# Altium PCB mt-kugreen-01.PcbDoc (part 1 of 2)
Units mm, origin at the board's own origin, x right, y up, seen from the top; angles counter-clockwise.
Board outline 84.8 x 48.4 mm, 2 copper layers (Top Layer, Bottom Layer); 75 components, 51 nets, 296 pads, 97 vias.
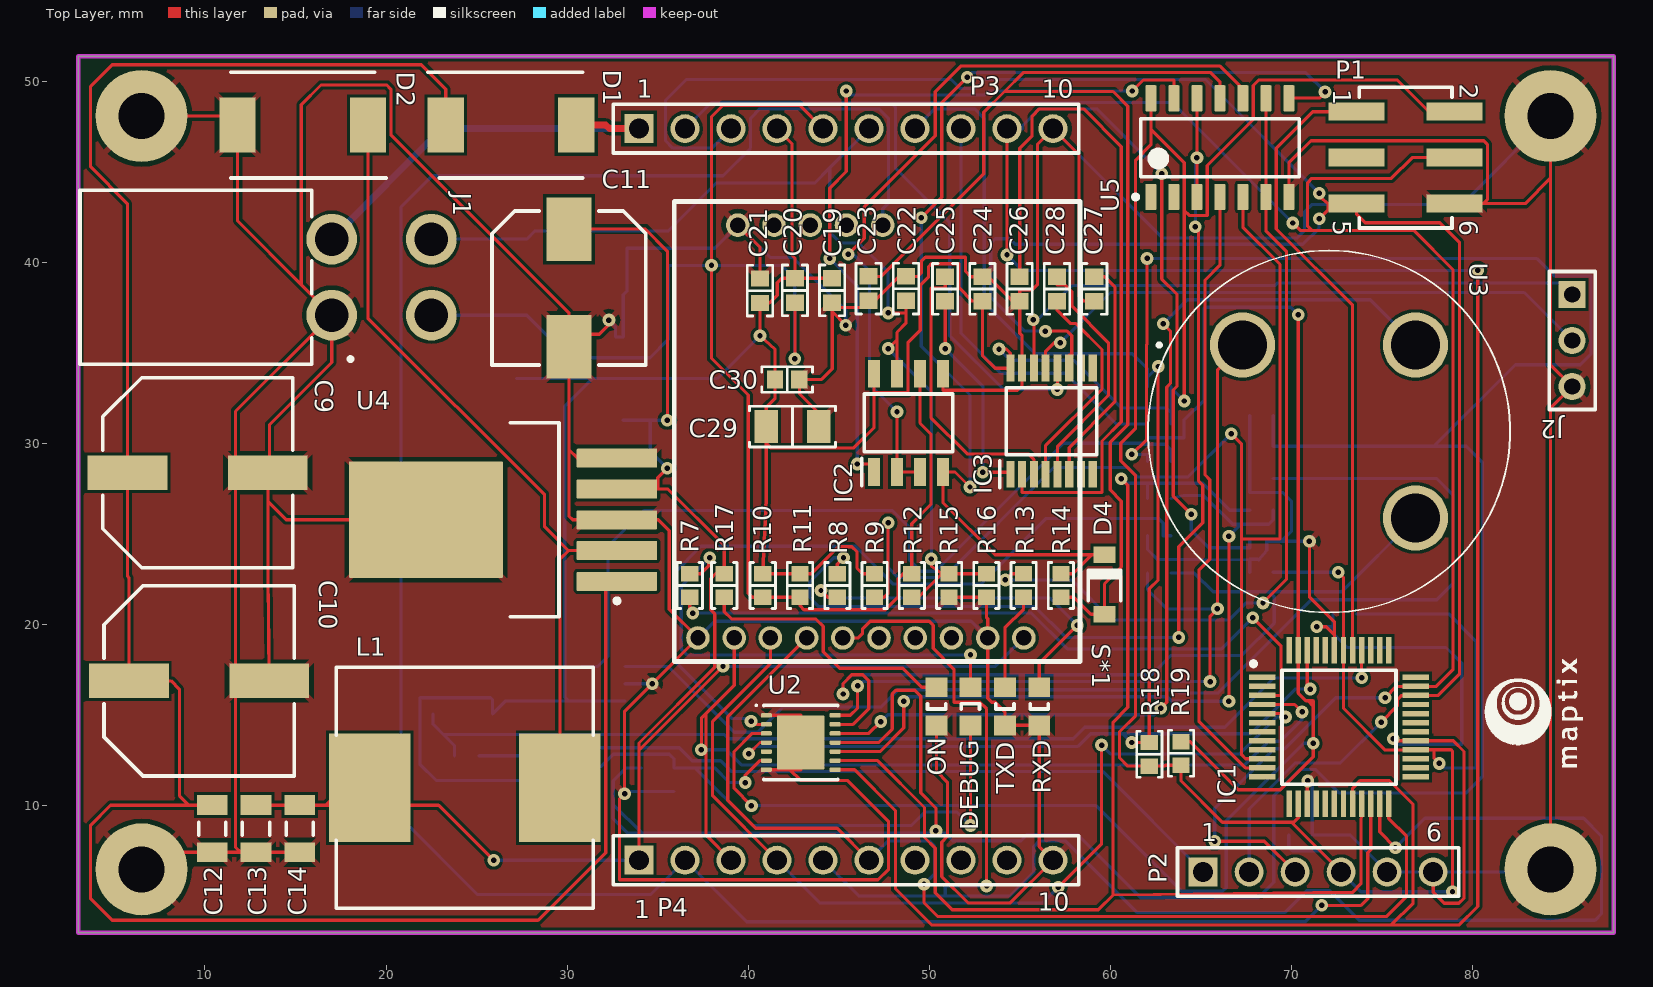
[diagram p0: Top Layer view]
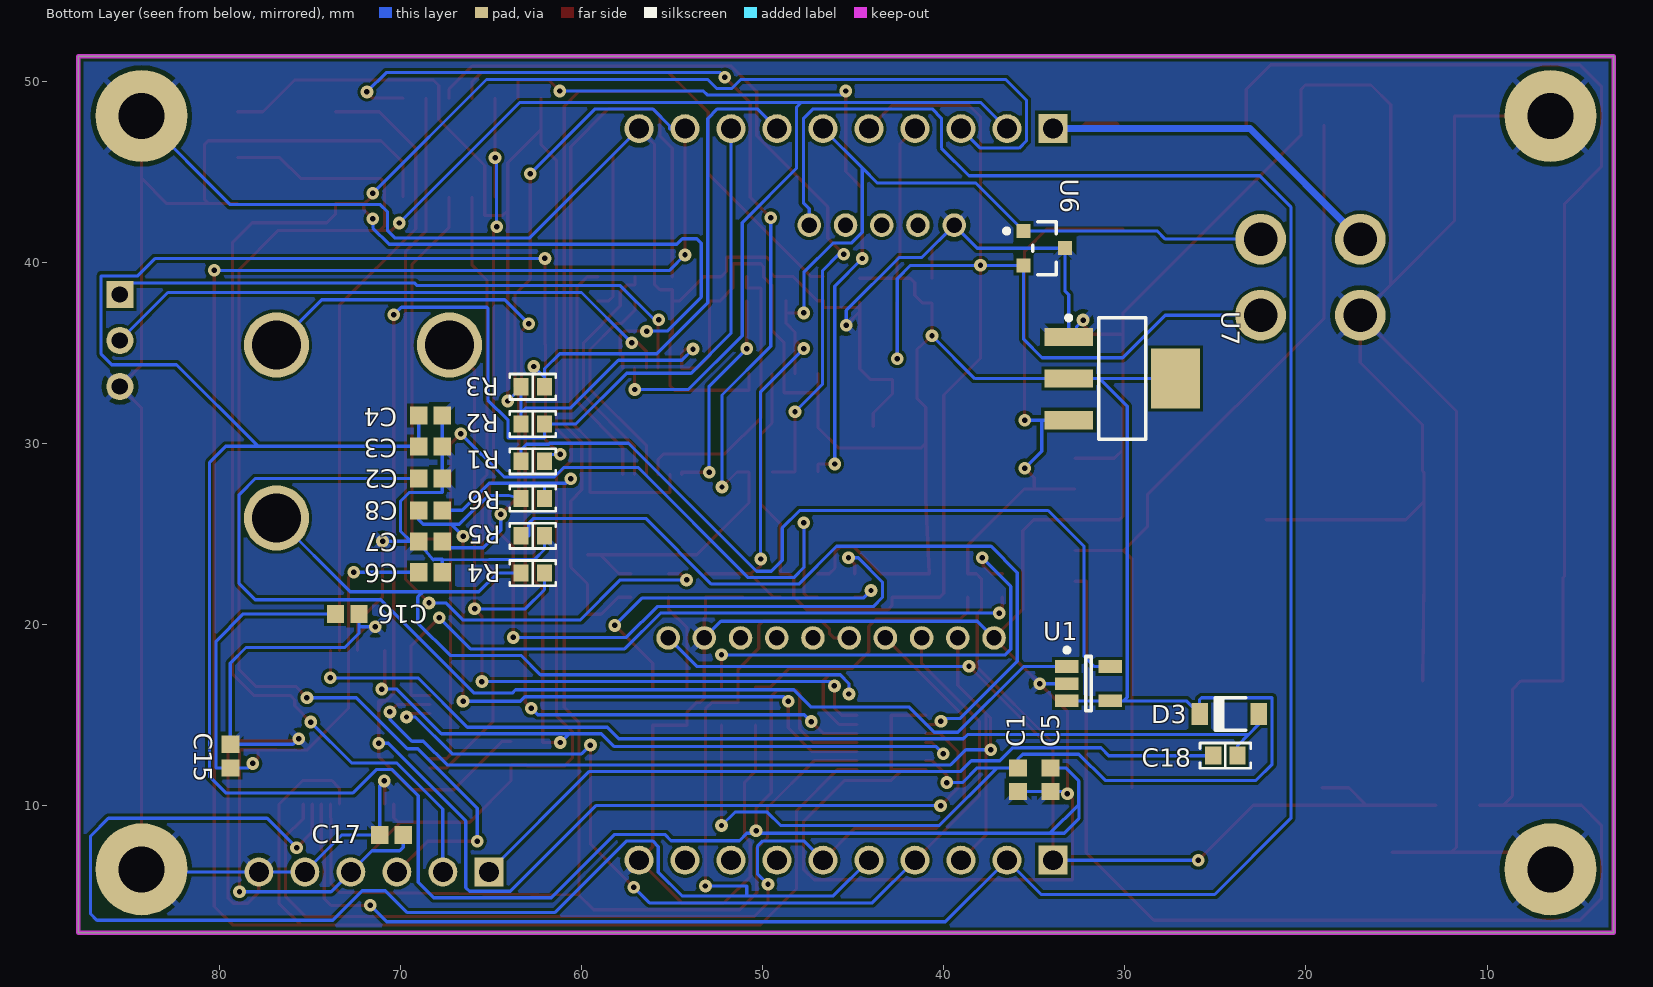
[diagram p1: Bottom Layer view, seen from below]
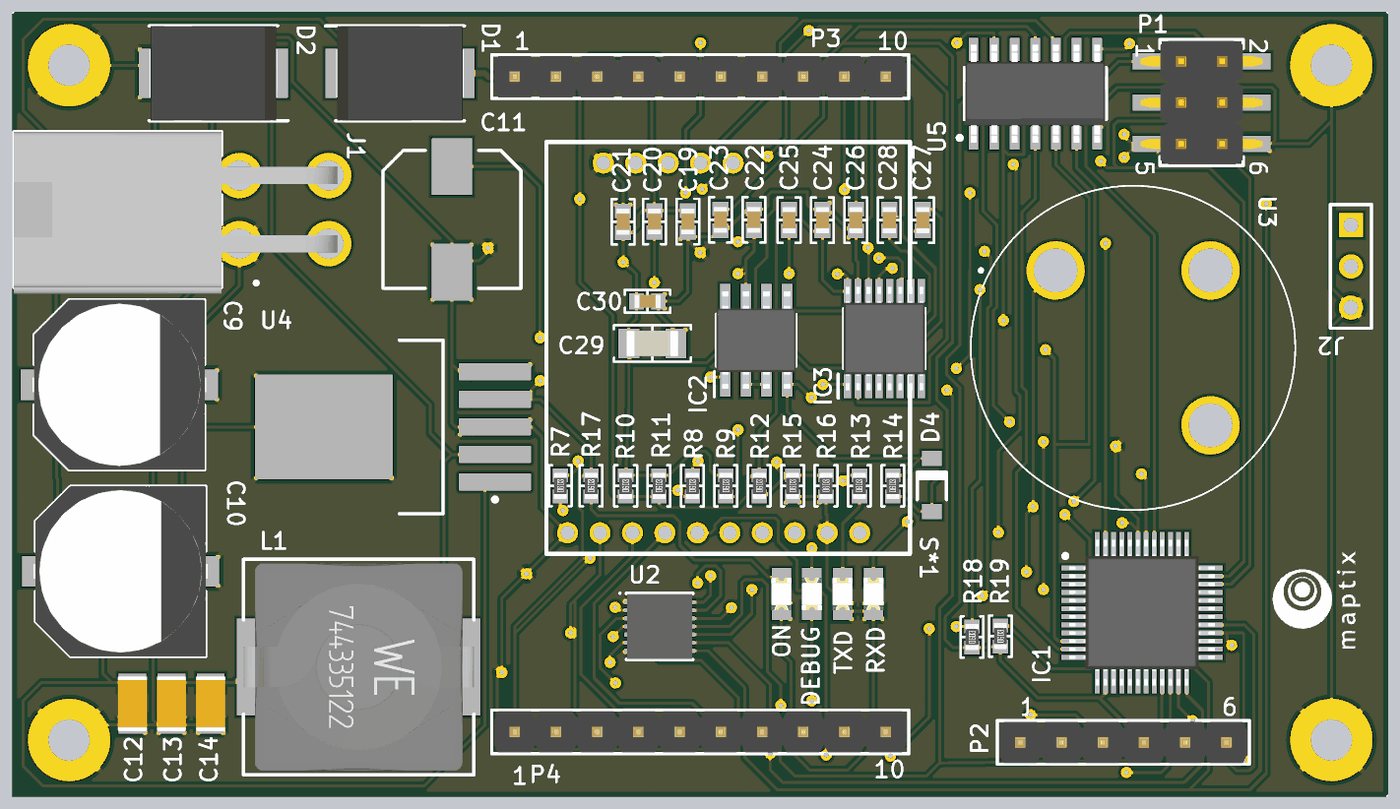
[diagram p2: 3D render of the assembled board from above, using the file's embedded part models]

## Layer stack, top to bottom
Top Solder: solder mask 0.0102, Solder Resist, Dk 3.5
Top Layer: signal copper 0.0356
Dielectric 1: dielectric 0.32, FR-4, Dk 4.8
Bottom Layer: signal copper 0.0356
Bottom Solder: solder mask 0.0102, Solder Resist, Dk 3.5

## Board outline
3,3 87.8,3 87.8,51.4 3,51.4

## Design rules (kind name [scope] priority, off if disabled: settings)
Clearance Clearance_Plane [InNetClass('All Nets') vs InNamedPolygon('Bottom_plane') + InNamedPolygon('Bottom_plane')] p1: gap=0.178 ignorepadtopadclearanceinfootprint=FALSE
Clearance Clearance_Board_Keepout [OnLayer('KeepOutLayer')] p2: gap=0.203 ignorepadtopadclearanceinfootprint=FALSE
Clearance Minimum_pad_component_clearcance [(InPadClass('All Pads') AND InComponentClass('All Components')) vs (InPadClass('All Pads') AND InComponentClass('All Components'))] p3: gap=0.152 ignorepadtopadclearanceinfootprint=FALSE
Clearance Clearance_DiffPairRouting [(IsTrack AND InDifferentialPairClass('All Differential Pairs')) vs (IsTrack AND InDifferentialPairClass('All Differential Pairs'))] p4: gap=0.203 ignorepadtopadclearanceinfootprint=FALSE
Clearance Clearance_Via_Pad [(IsVia) vs (IsPad)] p5: gap=0.203 ignorepadtopadclearanceinfootprint=FALSE
Clearance Clearance_Via_Via [(IsVia) vs (IsVia)] p6: gap=0.203 ignorepadtopadclearanceinfootprint=FALSE
Clearance Clearance_wara_Default [All] p7: gap=0.178 ignorepadtopadclearanceinfootprint=FALSE
ComponentClearance [All] p1 off: gap=0.254 collisioncheckmode=3 verticalgap=0.254 showdistances=FALSE
DiffPairsRouting [All] p1: maxlimit=0.254 minlimit=0.203 mostfreqgap=0.203 toplayer_minwidth=0.381 toplayer_maxwidth=0.381 toplayer_prefwidth=0.381 bottomlayer_minwidth=0.381 bottomlayer_maxwidth=0.381 bottomlayer_prefwidth=0.381 maxuncoupledlength=12.7
HoleSize [All] p1: absolutevalues=TRUE maxlimit=6.604 minlimit=0.203 maxpercent=80.000 minpercent=20.000
MinimumAnnularRing [All] p1: minimumring=0.152
MinimumSolderMaskSliver [All] p1: minsoldermaskwidth=0.051
MinimumSolderMaskSliver SilkscreenOverComponentPads [All] p2: minsoldermaskwidth=0.051
PlaneConnect [InNet('GND')] p1: planeconnectstyle=Relief reliefexpansion=0.508 reliefentries=4 reliefconductorwidth=0.254 reliefairgap=0.254
PolygonConnect [All] p1: connectstyle=Relief reliefconductorwidth=0.305 reliefentries=4 polygonreliefangle="45 Angle" airgapwidth=0.254
RoutingPriority RoutingPriority_Power [(InNet('VCC_GPS') AND InNet('VCC_GPS_ANT') AND InNet('VBAT') AND InNetClass('Power') AND InNetClass('signal'))] p1: routingpriority=100
RoutingPriority [All] p2 off: routingpriority=50
RoutingVias [All] p1: holewidth=0.3 width=0.7 viastyle="Through Hole" minholewidth=0.3 minwidth=0.7 maxholewidth=0.3 maxwidth=0.7
SMDNeckDown [InNetClass('POWER')] p1: percent=80.000
SilkToSolderMaskClearance [IsPad] p1: minsilkscreentomaskgap=0.076 clearancetoexposedcopper=TRUE
SolderMaskExpansion [All] p1: expansion=0.064 istentingtop=FALSE
UnRoutedNet [All] p1: checkbadconnections=TRUE
Width Width_3V3 [InNet('3.3V')] p1 off: maxlimit=0.381 minlimit=0.203 preferedwidth=0.381
Width Width_Power [InNet('+HV')] p2: maxlimit=0.381 minlimit=0.178 preferedwidth=0.381
Width Width_All [All] p3: maxlimit=0.178 minlimit=0.152 preferedwidth=0.178
22 further rules are at their usual default settings.

## Classes and differential pairs
component class power-supply: C9 C10 C11 C12 C13 C14 C29 C30 D1 D2 J1 L1 ON R17 U4 U7
component class gas-sensor: C1 C2 C3 C4 C5 C6 C7 C8 R1 R2 R3 R4 R5 R6 U1 U2 U3
component class Controller: C15 C16 C17 C18 D3 DEBUG IC1 P1 P2 R7 R18 R19
component class communication: C19 C20 C21 C22 C23 C24 C25 C26 C27 C28 D4 IC2 IC3 J2 P3 P4 R8 R9 R10 R11 R12 R13 R14 R15 R16 RXD TXD U5 U6

## Components (designator, comment, footprint, x,y, rotation, side; value= is the part's Value field where it differs from the comment)
C1 "0.1uF (50V)" CAPC1608X95X40NL15T15 35.9,11.45 r90 bottom
C2 "56pF (50V)" CAPC1608X95X40NL15T15 68.35,28.081 r0 bottom
C3 "0.022uF (16V)" CAPC1608X95X40NL15T15 68.35,29.856 r180 bottom
C4 "0.1uF (50V)" CAPC1608X95X40NL15T15 68.35,31.556 r0 bottom
C5 "0.022uF (16V)" CAPC1608X95X40NL15T15 34.1,11.45 r90 bottom
C6 "0.1uF (50V)" CAPC1608X95X40NL15T15 68.35,22.9 r0 bottom
C7 "1uF (MLCC)" CAPC1608X95X40NL15T15 68.35,24.611 r0 bottom
C8 "1uF (MLCC)" CAPC1608X95X40NL15T15 68.35,26.322 r0 bottom
C9 "220uF 50V (E)" PNSC-EEE-1HA221P_L 9.6,28.4 r0 top
C10 "220uF 50V (E)" PNSC-EEE-1HA221P_L 9.675,16.9 r0 top
C11 "10uF 6.3V (E)" NIC-CAPA2-8X10_V 30.1,38.6 r270 top
C12 "10uF 50V (1206)" CAPC3216X229X50LL20T25 10.406,8.74 r90 top
C13 "10uF 50V (1206)" CAPC3216X229X50LL20T25 12.817,8.74 r90 top
C14 "10uF 50V (1206)" CAPC3216X229X50LL20T25 15.228,8.74 r90 top
C15 "0.1uF (50V)" CAPC1608X95X40NL15T15 79.4,12.75 r270 bottom
C16 "0.1uF (50V)" CAPC1608X95X40NL15T15 72.95,20.6 r0 bottom
C17 "0.1uF (50V)" CAPC1608X95X40NL15T15 70.5,8.4 r180 bottom
C18 "1nF" "CAP 0603_1608" 24.45,12.775 r180 bottom
C19 "0.1uF" "CAP 0603_1608" 44.637,38.467 r90 top
C20 "1nF" "CAP 0603_1608" 42.579,38.467 r90 top
C21 "0.1uF" "CAP 0603_1608" 40.65,38.45 r270 top
C22 "1nF" "CAP 0603_1608" 48.711,38.567 r270 top
C23 "0.1uF" "CAP 0603_1608" 46.653,38.567 r90 top
C24 "0.1uF" "CAP 0603_1608" 52.934,38.55 r90 top
C25 "0.1uF" "CAP 0603_1608" 50.876,38.55 r90 top
C26 "0.1uF" "CAP 0603_1608" 54.992,38.55 r90 top
C27 "0.1uF" "CAP 0603_1608" 59.108,38.55 r90 top
C28 "0.1uF" "CAP 0603_1608" 57.05,38.55 r90 top
C29 "4.7uF" "CAP 1206_3216 - 1.8MM" 42.45,30.95 r180 top
C30 "0.1uF" "CAP 0603_1608" 42.15,33.55 r180 top
D1 "MBRS540T3G" DIOM7958X256N 26.9,47.6 r0 top
D2 "MBRS540T3G" DIOM7958X256N 15.4,47.6 r180 top
D3 "1N4148W-TP" MCC-SOD123_V 24.237,15.075 r0 bottom
D4 "1N4148W-TP" MCC-SOD123_V 59.675,22.225 r90 top
DEBUG "Green (0805)" 0805_A 52.275,15.5 r270 top
IC1 "ATMEGA1609-AFR" QFP50P900X900X120-48N 72.625,14.35 r0 top
IC2 "SN65HVD11HD" SOIC127P600X175-8N 48.85,31.15 r90 top
IC3 "MAX3232CPWR" SOP65P640X120-16N 56.75,31.25 r90 top
J1 "39-30-1041" 39-30-1040 3.1,39.2 r270 top
J2 "Header 3" HDR1X3 85.5,38.24 r270 top
L1 "TMAX-1365-101-M" WE-HCI-1365 24.35,11 r180 top
ON "Green (0805)" 0805_A 50.4,15.5 r90 top
P1 "61000621121" 61000621121 76.3,45.8 r270 top
P2 "61300611121" 61300611121 71.475,6.35 r0 top
P3 "61301011121" 61301011121 45.4,47.4 r0 top locked
P4 "61301011121" 61301011121 45.4,7 r0 top
R1 "0" "RES 0603_1608" 62.7,29.03 r0 bottom
R2 "10k" "RES 0603_1608" 62.7,31.088 r0 bottom
R3 "10k" "RES 0603_1608" 62.7,33.146 r0 bottom
R4 "0" "RES 0603_1608" 62.7,22.856 r0 bottom
R5 "0" "RES 0603_1608" 62.7,24.914 r0 bottom
R6 "0" "RES 0603_1608" 62.7,26.972 r0 bottom
R7 "200" "RES 0603_1608" 36.775,22.175 r90 top
R8 "200" "RES 0603_1608" 44.92,22.172 r90 top
R9 "200" "RES 0603_1608" 46.978,22.172 r90 top
R10 "1k" "RES 0603_1608" 40.804,22.172 r90 top
R11 "470" "RES 0603_1608" 42.862,22.172 r90 top
R12 "120" "RES 0603_1608" 49.036,22.172 r90 top
R13 "200" "RES 0603_1608" 55.21,22.172 r90 top
R14 "1k" "RES 0603_1608" 57.268,22.172 r90 top
R15 "1k" "RES 0603_1608" 51.094,22.172 r90 top
R16 "470" "RES 0603_1608" 53.152,22.172 r90 top
R17 "200" "RES 0603_1608" 38.675,22.175 r90 top
R18 "1.5k" "RES 0603_1608" 62.15,12.85 r90 top
R19 "1.5k" "RES 0603_1608" 63.9,12.9 r90 top
RXD "Red (0805)" 0805_A 56.075,15.5 r90 top
S*1 "ZE07-CO" ZE07-CO 35.925,43.375 r270 top
TXD "Red (0805)" 0805_A 54.175,15.5 r90 top
U1 "LM4120AIM5-2.5/NOPB" MF05A_M 32,16.75 r180 bottom
U2 "LMP91000SDE/NOPB" NHL0014B_V_Pae 42.9,13.5 r0 top
U3 "ME3-HF" ME3SO2 67.3,35.45 r270 top
U4 "LM2576SX-5.0/NOPB" KTT0005B_M 26.45,25.8 r180 top
U5 "SN74HC14DR" D0014A_N 66.05,46.35 r90 top
U6 "SM712-02HTG" LFUS-SOT23-3_V 34.445,40.8 r180 bottom
U7 "LD1117AS33TR" SOT-223_M 30.15,33.6 r180 bottom

## Footprints (in the part's own frame and the unit in brackets; to place one, negate y for a bottom-side part, rotate by r counter-clockwise, add the part's x,y. Pads: shape width x height; smd on the part's side, far side on the other; paste and mask are expansions set on the pad)
39-30-1040 [mm]
  round 2.8 hole 1.85: 1(2.1,13.9) 2(-2.1,13.9) 3(2.1,19.4) 4(-2.1,19.4)
  silkscreen extent -4.8,0 4.8,15.02, body extent -4.8,0 5.2,19.94, height 11.4
0805_A [mm] "Chip LED, 2-Leads, Body 2.0x1.3mm, IPC Medium Density"
  rect 1.1x1.2 smd: 1(-1.05,0) 2(1.05,0)
  silkscreen extent -0.15,-0.5 0.15,0.5, body extent -1,-0.62 1,0.63, height 0.68
61000621121 [mm] "Pin Header, pitch 2.54 mm, SMD, Vertical, dual row, 6p"
  rect 1x3.1 smd: 1(-2.54,-2.7) 2(-2.54,2.7) 3(0,-2.7) 4(0,2.7) 5(2.54,-2.7) 6(2.54,2.7)
  silkscreen extent -3.88,-2.57 3.89,2.56, body extent -3.81,-3.75 3.81,3.75, height 9.62
61300611121 [mm] "Pin Header, pitch 2.54 mm, THT, Vertical, single row, 6p"
  rect 1.6x1.6 hole 1.1: 1(-6.35,0)
  round 1.6 hole 1.1: 2(-3.81,0) 3(-1.27,0) 4(1.27,0) 5(3.81,0) 6(6.35,0)
  silkscreen extent -7.77,-1.34 7.77,1.35, body extent -7.62,-1.27 7.62,1.27, height 8.57
61301011121 [mm] "Pin Header, pitch 2.54 mm, THT, Vertical, single row, 10p"
  rect 1.6x1.6 hole 1.1: 1(-11.43,0)
  round 1.6 hole 1.1: 2(-8.89,0) 3(-6.35,0) 4(-3.81,0) 5(-1.27,0) 6(1.27,0) 7(3.81,0) 8(6.35,0) 9(8.89,0) 10(11.43,0)
  silkscreen extent -12.85,-1.35 12.85,1.34, body extent -12.7,-1.27 12.7,1.27, height 8.57
"CAP 0603_1608" [mm] "Chip Capacitor, 2-Leads, Body 1.60x0.80mm, IPC Medium Density"
  rect 0.9x1 smd: 1(-0.675,0) 2(0.675,0)
  silkscreen extent -1.4,-0.7 1.4,0.7, body extent -0.8,-0.41 0.8,0.41, height 0.82
"CAP 1206_3216 - 1.8MM" [mm] "Chip Capacitor, 2-Leads, Body 3.25x1.60mm, IPC Medium Density"
  rect 1.3x1.8 smd: 1(-1.45,0) 2(1.45,0)
  silkscreen extent -2.38,-1.13 2.37,1.12, body extent -1.6,-0.8 1.6,0.8, height 1.8
CAPC1608X95X40NL15T15 [mm] "Chip Capacitor, 2-Leads, Body 1.60x0.80mm, IPC Medium Density"
  rect 0.95x1 smd: 1(-0.65,0) 2(0.65,0)
  body extent -0.88,-0.48 0.87,0.47, height 0.95
CAPC3216X229X50LL20T25 [mm] "Chip Capacitor, 2-Leads, Body 3.40x1.80mm, IPC High Density"
  rect 1.1x1.7 smd: 1(-1.3,0) 2(1.3,0)
  silkscreen extent -0.35,-0.75 0.35,0.75, body extent -1.7,-0.9 1.7,0.9, height 2.29
D0014A_N [mm] "SOIC, 14-Leads, Body 8.75x4mm, Pitch 1.27mm, IPC Medium Density"
  rrect17% 1.45x0.6 smd: 1(-2.725,3.81) 2(-2.725,2.54) 3(-2.725,1.27) 4(-2.725,0) 5(-2.725,-1.27) 6(-2.725,-2.54) 7(-2.725,-3.81) 8(2.725,-3.81) 9(2.725,-2.54) 10(2.725,-1.27) 11(2.725,0) 12(2.725,1.27) 13(2.725,2.54) 14(2.725,3.81)
  silkscreen extent -2.85,-4.38 1.6,4.78, body extent -3.02,-4.32 3.02,4.32, height 1.59
DIOM7958X256N [mm]
  rect 2x3.05 smd: 1(-3.6,0) 2(3.6,0)
  silkscreen extent -4.6,-2.92 3.97,2.92, body extent -3.97,-2.92 3.97,2.92, height 2.56
HDR1X3 [mm] "Connector; Header; 3 Position"
  rect 1.5x1.5 hole 0.9: 1(0,0)
  round 1.5 hole 0.9: 2(2.54,0) 3(5.08,0)
  silkscreen extent -1.27,-1.27 6.35,1.27
KTT0005B_M [mm] "DPAK, 5-Leads, Body 10.65x9.65mm, Pitch 1.7mm, IPC Low Density"
  rrect10% 4.45x1.05 smd: 1(-6.3,3.4) 2(-6.3,1.7) 3(-6.3,0) 4(-6.3,-1.7) 5(-6.3,-3.4)
  rrect2% 8.5x6.45 smd: 6(4.25,0)
  silkscreen extent -6.43,-5.35 -0.4,5.35, body extent -3.1,-5.32 6.55,5.33, height 4.83
LFUS-SOT23-3_V [mm] "SOT23, 3-Leads, Body 2.92x1.3mm, Pitch 0.95mm"
  rect 0.78x0.78 smd: 1(-1.145,0.95) 2(-1.145,-0.95) 3(1.145,0)
  silkscreen extent -2.21,-1.46 0.65,1.46, body extent -0.65,-1.46 0.65,1.46, height 1.12
MCC-SOD123_V [mm] "SOD123, 2-Leads, Body 2.7x1.6mm, Height 1.35mm"
  rect 0.914x1.219 smd: 1(-1.638,0) 2(1.638,0)
  silkscreen extent -0.91,-0.9 0.78,0.9, body extent -1.35,-0.8 1.35,0.8, height 1.35
ME3SO2 [mm]
  round 3.6 hole 2.7: 1(0,0) 2(0,9.55) 3(9.55,9.55)
  silkscreen extent -5.23,-5.22 14.77,14.77
MF05A_M [mm] "SOT23, 5-Leads, Body 2.9x1.6mm, Pitch 0.95mm, Lead Span 2.8mm, IPC Low Density"
  rect 1.3x0.7 smd: 1(-1.2,0.95) 2(-1.2,0) 3(-1.2,-0.95) 4(1.2,-0.95) 5(1.2,0.95)
  silkscreen extent -1.33,-1.5 0.15,1.97, body extent -0.83,-1.49 0.83,1.5, height 1.19
NHL0014B_V_Pae [mm] "SON, 10-Leads, Body 4x4mm, Pitch 0.5mm, Thermal Pad 3x2.6mm, TI Recommend"
  rrect40% 0.6x0.25 smd: 1(-1.9,1.5) 2(-1.9,1) 3(-1.9,0.5) 4(-1.9,0) 5(-1.9,-0.5) 6(-1.9,-1) 7(-1.9,-1.5) 8(1.9,-1.5) 9(1.9,-1) 10(1.9,-0.5) 11(1.9,0) 12(1.9,0.5) 13(1.9,1) 14(1.9,1.5)
  rrect4% 2.6x3 smd paste-1.3: 15(0,0)
  silkscreen extent -2.5,-2.05 2.05,2.1, body extent -2,-2 2,2, height 0.8
NIC-CAPA2-8X10_V [mm] "Aluminum Electrolytic Capacitor, Diameter 8mm, Height 10.8mm, Pitch 6.5mm"
  rect 3.5x2.5 smd: 1(-3.25,0) 2(3.25,0)
  silkscreen extent -4.25,-4.25 4.25,4.25, body extent -3.99,-3.97 3.99,4, height 10.8
PNSC-EEE-1HA221P_L [mm] "Aluminum Electrolytic Capacitor, 2-Leads, Body 10.5x10.5mm, IPC High Density"
  rect 4.4x1.9 smd: 1(-3.875,0) 2(3.875,0)
  silkscreen extent -5.25,-5.25 5.25,5.25, body extent -5.36,-5.25 5.36,5.25, height 10.5
QFP50P900X900X120-48N [mm]
  rect 1.475x0.3 smd: 1(-4.238,2.75) 2(-4.238,2.25) 3(-4.238,1.75) 4(-4.238,1.25) 5(-4.238,0.75) 6(-4.238,0.25) 7(-4.238,-0.25) 8(-4.238,-0.75) 9(-4.238,-1.25) 10(-4.238,-1.75) 11(-4.238,-2.25) 12(-4.238,-2.75) 25(4.238,-2.75) 26(4.238,-2.25) 27(4.238,-1.75) 28(4.238,-1.25) 29(4.238,-0.75) 30(4.238,-0.25) 31(4.238,0.25) 32(4.238,0.75) 33(4.238,1.25) 34(4.238,1.75) 35(4.238,2.25) 36(4.238,2.75)
  rect 0.3x1.475 smd: 13(-2.75,-4.238) 14(-2.25,-4.238) 15(-1.75,-4.238) 16(-1.25,-4.238) 17(-0.75,-4.238) 18(-0.25,-4.238) 19(0.25,-4.238) 20(0.75,-4.238) 21(1.25,-4.238) 22(1.75,-4.238) 23(2.25,-4.238) 24(2.75,-4.238) 37(2.75,4.238) 38(2.25,4.238) 39(1.75,4.238) 40(1.25,4.238) 41(0.75,4.238) 42(0.25,4.238) 43(-0.25,4.238) 44(-0.75,4.238) 45(-1.25,4.238) 46(-1.75,4.238) 47(-2.25,4.238) 48(-2.75,4.238)
  silkscreen extent -4.85,-3.15 3.15,3.62, body extent -4.5,-4.5 4.5,4.5, height 1.2
"RES 0603_1608" [mm] "Chip Resistor, 2-Leads, Body 1.60x0.80mm, IPC Medium Density"
  rect 0.85x0.95 smd: 1(-0.65,0) 2(0.65,0)
  silkscreen extent -1.27,-0.7 1.27,0.7, body extent -0.8,-0.4 0.8,0.4, height 0.45
SOIC127P600X175-8N [mm]
  rect 1.525x0.65 smd: 1(-2.712,1.905) 2(-2.712,0.635) 3(-2.712,-0.635) 4(-2.712,-1.905) 5(2.712,-1.905) 6(2.712,-0.635) 7(2.712,0.635) 8(2.712,1.905)
  silkscreen extent -3.47,-2.45 1.6,2.58, body extent -3,-2.45 3,2.45, height 1.75
SOP65P640X120-16N [mm]
  rect 1.475x0.45 smd: 1(-2.938,2.275) 2(-2.938,1.625) 3(-2.938,0.975) 4(-2.938,0.325) 5(-2.938,-0.325) 6(-2.938,-0.975) 7(-2.938,-1.625) 8(-2.938,-2.275) 9(2.938,-2.275) 10(2.938,-1.625) 11(2.938,-0.975) 12(2.938,-0.325) 13(2.938,0.325) 14(2.938,0.975) 15(2.938,1.625) 16(2.938,2.275)
  silkscreen extent -3.67,-2.5 1.85,2.85, body extent -3.2,-2.5 3.2,2.5, height 1.2
SOT-223_M [mm] "SOT223, 4-Leads, Body 6.5x3.5mm, Pitch 2.3mm, Lead Span 7mm, IPC Low Density"
  rect 2.7x1 smd: 1(-2.95,2.3) 2(-2.95,0) 3(-2.95,-2.3)
  rect 2.7x3.3 smd: 4(2.95,0)
  silkscreen extent -3.08,-3.35 1.3,3.47, body extent -1.85,-3.35 1.85,3.35, height 1.8
WE-HCI-1365 [mm] "Inductor, 2-Leads, Body 13.2x12.8x6.5 mm"
  rect 4.5x6 smd: 1(-5.25,0) 2(5.25,0)
  silkscreen extent -7.1,-6.65 7.1,6.65, body extent -7.1,-6.4 7.1,6.4, height 6.49
ZE07-CO [mm]
  round 1.3 hole 0.85 paste+0: 1(1.3,11.5)
  round 1.3 hole 0.85: 2(1.3,9.5) 3(1.3,7.5) 4(1.3,5.5) 5(1.3,3.5) 6(24.1,1.3) 7(24.1,3.3) 8(24.1,5.3) 9(24.1,7.3) 10(24.1,9.3) 11(24.1,11.3) 12(24.1,13.3) 13(24.1,15.3) 14(24.1,17.3) 15(24.1,19.3)
  silkscreen extent 0,0 25.4,22.4

## Part data
C1 C2 C3 C4 C5 C6 C7 C8 C15 C16 C17: library part CMP-2006-00072-1, Manufacturer=Vitramon, Part Number=VJ0603Y332JXACW1BC
C9 C10: library part CMP-2000-06200-1, "Aluminum Electrolytic Capacitor, 220 uF, +/- 20%, 50 V, -40 to 85 degC, 2-Pin SMD, RoHS, Tape and Reel", AE Capacitor Case=RadialCan-SMD, Capacitance=220µF, Capacitance Tolerance=±20%, Life Time @ Temperature=2000hours@85°C, Manufacturer=Panasonic, Operating Temperature Max=85°C, Operating Temperature Min=-40°C, Package Description="2-Pin Surface Mount Device, Body 10.3 x 10.3 mm", Package Reference=SMD, Ripple Current AC=300mA, Voltage Rating=50V, Capacitance Tolerance ±=±20%, Capacitor Case Style=RadialCan-SMD, Datasheet URL=http://datasheet.octopart.com/EEE-1HA221P-Panasonic-datasheet-13265900.pdf, Datasheet Version=11/2012, Diameter=10mm, Height=10.2mm, Lifetime @ Temperature=2000hours@85°C, Manufacturer URL=http://www.panasonic.com/, Mounting Technology=SurfaceMount, Packaging=CutTape, Product Range=PANASONIC-SSeries, SVHC=ToBeAdvised
C11: library part CMP-0687-00071-1, "Aluminum Electrolytic Capacitor, UD Series, Low Impedance, 1000 uF, 6.3 V, + / - 20%, -55 to 105 degC, Chip Type, 8 x 10 mm D x L, Pb-Free, Reel", Manufacturer=Nichicon, PartNumber=UUD0J102MNL1GS, Rated Capacitance="1000 uF", Rated Ripple Current (at 100kHz)="450 mA", Rated Voltage="6.3 V", Tolerance Rated Capacitance="-20 to 20%", ComponentLink1Description="Manufacturer URL", ComponentLink1URL=http://www.nichicon.co.jp/, ComponentLink2Description=Datasheet, ComponentLink2URL=http://products.nichicon.co.jp/en/pdf/XJA043/e-ud.pdf, ComponentLink3Description="Package Specification", ComponentLink3URL=http://products.nichicon.co.jp/en/pdf/XJA043/e-ud.pdf, DatasheetVersion=08/2012, Diameter="8 mm", Endurance Time="5000 h", Impedance="0.17 Ohm", Length="10 mm", Mounting Technology="Surface Mount", PackageDescription="2-Pin Surface Mount Device, Diameter 8 mm, Height 10 mm, Pitch 6.5 mm", PackageReference=CAPAE-D8H10, Packing="Dia382mm Reel", RoHS=TRUE
C12 C13 C14: library part CMP-2000-05863-1, "Chip Capacitor, 10 uF, +/- 10%, 25 V, -55 to 85 degC, 1206 (3216 Metric), RoHS, Tape and Reel", Capacitance=10µF, Case Size/Dimension=1206, Dielectric=X5R, Manufacturer=AVX, Package Description="2-Pin Surface Mount Device, Body 3.2 x 1.6 mm", Rated Voltage=25V, Tolerance (%)=±10%, Datasheet URL=http://datasheets.avx.com/cx5r.pdf, Datasheet Version=05/2016, Manufacturer URL=http://www.avx.com/, Mounting Technology=SurfaceMount, Package Reference=1206
C18 C19 C20 C21 C22 C23 C24 C25 C26 C27 C28 C30: library part VJ0603Y332JXACW1BC, "CAP CERAMIC 50V X7R 0603", Capacitance=3300pF, Device Package="0603 (1608 Metric)", Manufacturer="Vishay Vitramon", Operating Temperature="-55°C ~ 125°C", Supplier Part Number 1=720-VJ0603Y332JXACW1BCCT-ND, Temperature Coefficient=X7R, Tolerance=±5%, Voltage - Rated=50V, Applications="General Purpose", ComponentLink1Description=Datasheet, ComponentLink1URL=https://www.vishay.com/docs/28548/vjw1bcbascomseries.pdf, ComponentLink2Description="DigiKey Link", ComponentLink2URL=http://digikey.com/product-detail/en/vishay-vitramon/VJ0603Y332JXACW1BC/720-VJ0603Y332JXACW1BCCT-ND/11198425, LastUpdated="1/2/2020 12:01:35 AM", Lifecycle Status=Active, Minimum Order=1, Mounting Type="Surface Mount, MLCC", Package / Case="0603 (1608 Metric)", Packaging=Unknown, Part Number=VJ0603Y332JXACW1BC, Part Status=Active, PartId=26247, Price=0.00, Series=VJ, Size / Dimension="0.063\" L x 0.031\" W (1.60mm x 0.80mm)", Supplier 1=DigiKey, Thickness (Max)="0.034\" (0.87mm)"
C29: library part C1206C335K4PACTU, "CAP CERAMIC 16V X5R 1206", Capacitance=3.3µF, Device Package="1206 (3216 Metric)", Manufacturer=KEMET, Operating Temperature="-55°C ~ 85°C", Supplier Part Number 1=399-1264-1-ND, Temperature Coefficient=X5R, Tolerance=±10%, Voltage - Rated=16V, Applications="General Purpose", ComponentLink1Description=Datasheet, ComponentLink1URL=https://api.kemet.com/component-edge/download/datasheet/C1206C335K4PACTU.pdf, ComponentLink2Description="DigiKey Link", ComponentLink2URL=http://digikey.com/product-detail/en/kemet/C1206C335K4PACTU/399-1264-1-ND/411539, LastUpdated="1/2/2020 12:03:41 AM", Lifecycle Status=Active, Minimum Order=1, Mounting Type="Surface Mount, MLCC", Package / Case="1206 (3216 Metric)", Packaging=ReReel, Part Number=C1206C335K4PACTU, Part Status=Active, PartId=19546, Price=0.00, Series="SMD Comm X5R", Size / Dimension="0.126\" L x 0.063\" W (3.20mm x 1.60mm)", Supplier 1=DigiKey, Thickness (Max)="0.071\" (1.80mm)"
D1 D2: "Diode", Manufacturer_Name="ON Semiconductor", Mouser Part Number=863-MBRS540T3G, RS Part Number=6880512, Allied Price/Stock=http://www.alliedelec.com/on-semiconductor-mbrs540t3g/70100196/, Allied_Number=70100196, Datasheet Link=http://www.onsemi.com/pub/Collateral/MBRS540T3-D.PDF, Height=2.56mm, Manufacturer_Part_Number=MBRS540T3G, Mouser Price/Stock=https://www.mouser.com/Search/Refine.aspx?Keyword=863-MBRS540T3G, RS Price/Stock=https://uk.rs-online.com/web/p/products/6880512
D3 D4: library part CMP-2000-04993-1, "High Speed Switching Diode, 400 mW, 150 mA, -65 to 150 degC, 2-Pin SOD123, RoHS, Tape and Reel", Average Forward Current-Max=0.15A, Manufacturer="Micro Commercial Components", Package Description="2-Pin Small Outline Diode, Body 2.7 x 1.6 mm, Height 1.35 mm", Package Reference=SOD123, Peak Current-Max=2A, Power Dissipation=400mW, Reverse Voltage-Max [Vrrm]=100V, Datasheet URL=https://datasheet.ciiva.com/16836/1n4148wsod123-16836277.pdf, Datasheet Version="Rev. C, 07/2014", Manufacturer URL=http://www.mccsemi.com/, Package URL=http://www.mccsemi.com/up_pdf/1N4448W(SOD-123).pdf, Reverse Recovery Time-Max=4ns
DEBUG ON RXD TXD: library part CMP-1426-00007-1, "SMD mono-color Chip LED, WL-SMCW, Green", Color=Green, Manufacturer="Wuerth Elektronik", PartNumber=150080GS75000, ComponentLink1Description="Manufacturer URL", ComponentLink1URL=http://www.we-online.com, ComponentLink2Description=Datasheet, ComponentLink2URL=http://katalog.we-online.com/led/datasheet/150080GS75000.pdf, PackageReference=0805_A
IC1: "Integrated Circuit", Manufacturer_Name=Microchip, Mouser Part Number=579-ATMEGA1609-AFR, Datasheet Link=https://componentsearchengine.com/Datasheets/1/ATMEGA1609-AFR.pdf, Height=1.2mm, Manufacturer_Part_Number=ATMEGA1609-AFR, Mouser Price/Stock=https://www.mouser.com/Search/Refine.aspx?Keyword=579-ATMEGA1609-AFR
IC2: "Integrated Circuit", Manufacturer_Name="Texas Instruments", Mouser Part Number=595-SN65HVD11HD, Datasheet Link=http://www.ti.com/lit/gpn/sn65hvd11-ht, Height=1.75mm, Manufacturer_Part_Number=SN65HVD11HD, Mouser Price/Stock=https://www.mouser.com/Search/Refine.aspx?Keyword=595-SN65HVD11HD
IC3: "Integrated Circuit", Manufacturer_Name="Texas Instruments", Mouser Part Number=595-MAX3232CPWR, Datasheet Link=http://www.ti.com/lit/gpn/max3232, Height=1.2mm, Manufacturer_Part_Number=MAX3232CPWR, Mouser Price/Stock=https://www.mouser.com/Search/Refine.aspx?Keyword=595-MAX3232CPWR
J1: "Connector", Manufacturer_Name=Molex, Mouser Part Number=538-39-30-1041, RS Part Number=6705754, Allied Price/Stock=https://www.alliedelec.com/molex-incorporated-39-30-1041/70374118/, Allied_Number=70374118, Datasheet Link=http://docs-emea.rs-online.com/webdocs/150e/0900766b8150e03e.pdf, Manufacturer_Part_Number=39-30-1041, Mouser Price/Stock=https://www.mouser.com/Search/Refine.aspx?Keyword=538-39-30-1041, RS Price/Stock=https://uk.rs-online.com/web/p/products/6705754
J2: "Header, 3-Pin", LatestRevisionDate=17-Jul-2002, LatestRevisionNote="Re-released for DXP Platform.", Publisher="Altium Limited"
L1: library part CMP-1351-00012-1, "SMD Flat Wire High Current Inductor WE-HCI, L=33.0 µH", Inductance="33.0 ÂµH", Manufacturer="Wuerth Elektronik", PartNumber=7443551331, ComponentLink1Description="Manufacturer URL", ComponentLink1URL=http://www.we-online.com, ComponentLink2Description=Datasheet, ComponentLink2URL=http://katalog.we-online.de/kataloge/eisos/media/pdf/7443551331.pdf, PackageDescription="Inductor, 2-Leads, Body 13.2 x 12.8 mm", PackageReference=WE-HCI-1365
P1: library part CMP-1502-01024-1, "SMT Vertical Pin Header WR-PHD, Pitch 2.54 mm, Dual Row, 6 pins", Contact Resistance=20mOhm, Manufacturer="Wurth Elektronik", Operating Temperature=-40to125degC, Rated Current=3A, Withstanding Voltage=500VAC, Working Voltage=250VAC, Datasheet URL=https://katalog.we-online.de/em/datasheet/6100xx21121.pdf, Gender=Male, Manufacturer URL=http://www.we-online.de, Mounting Technology=SMT, Orientation=Vertical, Package Reference=61000621121, Packaging=Tube, Part Number=61000621121, Pin Number=6, Pitch=2.54mm, Publisher=WurthElektronik, Row Number=Dual
P2: library part CMP-1502-01070-1, "THT Vertical Pin Header WR-PHD, Pitch 2.54 mm, Single Row, 6 pins", Contact Resistance=20mOhm, Manufacturer="Wurth Elektronik", Operating Temperature=-40to105degC, Rated Current=3A, Withstanding Voltage=500VAC, Working Voltage=250VAC, Datasheet URL=https://katalog.we-online.de/em/datasheet/6130xx11121.pdf, Gender=Male, Manufacturer URL=http://www.we-online.de, Mounting Technology=THT, Orientation=Vertical, Package Reference=61300611121, Packaging=Bag, Part Number=61300611121, Pin Number=6, Pitch=2.54mm, Publisher=WurthElektronik, Row Number=Single
P3 P4: library part CMP-1502-01082-1, "THT Vertical Pin Header WR-PHD, Pitch 2.54 mm, Single Row, 10 pins", Contact Resistance=20mOhm, Manufacturer="Wurth Elektronik", Operating Temperature=-40to105degC, Rated Current=3A, Withstanding Voltage=500VAC, Working Voltage=250VAC, Datasheet URL=https://katalog.we-online.de/em/datasheet/6130xx11121.pdf, Gender=Male, Manufacturer URL=http://www.we-online.de, Mounting Technology=THT, Orientation=Vertical, Package Reference=61301011121, Packaging=Bag, Part Number=61301011121, Pin Number=10, Pitch=2.54mm, Publisher=WurthElektronik, Row Number=Single
R1 R2 R3 R4 R5 R6 R7 R8 R9 R10 R11 R12 R13 R14 R15 R16 R17 R18 R19: library part CRCW060329K4FKEA, "Resistor", Device Package="0603 (1608 Metric)", Manufacturer="Vishay Dale", Operating Temperature="-55°C ~ 155°C", Power (Watts)="0.1W, 1/10W", Ratings=AEC-Q200, Resistance="29.4 kOhms", Supplier Device Package=0603, Supplier Part Number 1=541-29.4KHCT-ND, Temperature Coefficient=±100ppm/°C, Tolerance=±1%, ComponentLink1Description=Datasheet, ComponentLink1URL=http://www.vishay.com/docs/20035/dcrcwe3.pdf, ComponentLink2Description="DigiKey Link", ComponentLink2URL=http://digikey.com/product-detail/en/vishay-dale/CRCW060329K4FKEA/541-29.4KHCT-ND/1179975, Composition="Thick Film", Features="Automotive AEC-Q200", Height - Seated (Max)="0.020\" (0.50mm)", LastUpdated="1/2/2020 12:06:58 AM", Lifecycle Status=Active, Minimum Order=1, Number of Terminations=2, Package / Case="0603 (1608 Metric)", Packaging=TapeAndReel, Part Number=CRCW060329K4FKEA, Part Status=Active, PartId=7975, Price=0.00, Series=CRCW, Size / Dimension="0.061\" L x 0.033\" W (1.55mm x 0.85mm)", Supplier 1=DigiKey
U1: library part CMP-0074-00248-2, "Precision Micropower Low Dropout Voltage Reference, 5-pin SOT-23, Pb-Free", Manufacturer="National Semiconductor", PackageTopMarking=R08A*XTT, PowerWise=Y, ComponentLink1Description="LM4120 Datasheet", ComponentLink1URL=http://www.national.com/ds/LM/LM4120.pdf, ComponentLink2Description="LM4120 Web Page", ComponentLink2URL=http://www.national.com/pf/LM/LM4120.html, ComponentLink3Description="MF05A Package Page", ComponentLink3URL=http://www.national.com/packaging/folders/mf05a.html, CompType="Voltage Reference IC", DatasheetVersion=Mar-2005, PackageDescription="Molded SOT-23, .115 x .063 x .040 in Body, 5 Lead, .0375 in Pitch", PackageReference=MF05A, PackageVersion="revD, Aug-2008", PinCount=5, RevisionNote="Component URLs added", RoHS=Y
U2: library part CMP-0064-00201-2, "Configurable AFE Potentiostat for Low-Power Chemical Sensing Applications, 14-pin LLP, 250 Reel", Manufacturer="Texas Instruments", PackageTopMarking=NS*UZXYTT*L91000, PowerWise=N, ComponentLink1Description="Datasheet URL", ComponentLink1URL=http://www.ti.com/general/docs/lit/getliterature.tsp?genericPartNumber=LMP91000&fileType=pdf, CompType=OtherParts, PackageDescription="LLP, Plastic, Dual, 4 x 4 x 0.8mm Body, 14 Lead, 0.5mm Pitch, No Pullback", PackageReference=NHL0014B, PinCount=14, RoHS=Y
U3: library part ME3-SO2, "Undefined or Miscellaneous", Manufacturer_Name=WINSEN, Datasheet Link=http://www.eleparts.co.kr/data/goods_old/design/product_file/SENSOR/gas/ME3-SO2%200-20ppm(ver1.2)%20Manual.pdf, Height=16.4mm, Manufacturer_Part_Number=ME3-SO2
U4: library part CMP-0069-00122-3, "SIMPLE SWITCHER® 3A Step-Down Voltage Regulator, 5-pin TO-263, Pb-Free", Manufacturer="Texas Instruments", PackageTopMarking="NSUZXYTTE#*LM2576S*-5.0 P+", PowerWise=N, Code_JEDEC=MO-169-AB, ComponentLink1Description="Datasheet URL", ComponentLink1URL=http://www.ti.com/general/docs/lit/getliterature.tsp?genericPartNumber=LM2576&fileType=pdf, CompType=Switcher, PackageDescription="TO-263, Molded, .400 x .390 x .180in, 5 Lead, .067in Pitch, Surface Mount", PackageReference=KTT0005B, PinCount=5, RoHS=Y
U5: library part CMP-1615-00273-3, "Hex Schmitt-Trigger Inverters, D0014A, LARGE T&R", F @ Nom Voltage(Max)(Mhz)=20, Generic Part Number=SN74HC14, ICC @ Nom Voltage(Max)(mA)=0.02, Manufacturer="Texas Instruments", Operating Temperature Range(C)="-40 to 85", Rating=Catalog, tpd @ Nom Voltage(Max)(ns)=31, Voltage(Nom)(V)=5, Bits(#)=6, Code_JEDEC=MS-012, DatasheetVersion=SCLS085G, Input Type=CMOS, Output Drive (IOL/IOH)(Max)(mA)=-4/4, Output Type=CMOS, PackageReference=D0014A, Schmitt Trigger=Yes, Technology Family=HC, VCC(Max)(V)=6, VCC(Min)(V)=2
U6: library part CMP-2000-07561-1, "TVS Diode Array, 600 W, 12 V, -40 to 125 degC, 3-Pin SOT23, RoHS, Tape and Reel", Breakdown Voltage=13.3V, Capacitance=75pF, Case\/Package=TO-236-3, Clamping Voltage=31V, Leakage Current=20uA, Manufacturer=Littelfuse, Max Operating Temperature=125degC, Max Power Dissipation=600W, Max Surge Current=19A, Min Operating Temperature=-40degC, Package Description="3-Pin Surface Mount Device, Body 2.92 x 1.3 mm, Pitch 0.95 mm", Package Quantity=3000, Package Reference=SOT23-3, Power Line Protection=No, Reverse Standoff Voltage=12V, Datasheet URL=http://www.littelfuse.com/~/media/electronics/datasheets/tvs_diode_arrays/littelfuse_tvs_diode_array_sm712_datasheet.pdf.pdf, Datasheet Version=12/2016, Depth=1.4mm, Direction=Bidirectional, Element Configuration=Dual, Lead Free=LeadFree, Length=3.04mm, Manufacturer URL=http://www.littelfuse.com/, Min Breakdown Voltage=13.3V, Mount=SurfaceMount, Mounting Technology=SurfaceMount, Number of Bidirectional Channels=2, Number of Channels=2, Number of Pins=3, Packaging=TapeandReel, Peak Pulse Current=19A, Peak Pulse Power=600W, Polarity=Bidirectional, Radiation Hardening=No, RoHSCompliant=True, Termination=SMD/SMT, Working Voltage=12V
U7: library part CMP-0244-00316-1, "1A, Low Drop Positive Voltage Regulator, 3.3V, 4-Pin SOT-223, Tape and Reel", ComponentLink1Description="Manufacturer URL", ComponentLink1URL=http://www.st.com, ComponentLink2Description=Datasheet, ComponentLink2URL=http://www.st.com/internet/com/TECHNICAL_RESOURCES/TECHNICAL_LITERATURE/DATASHEET/CD00002116.pdf, DatasheetVersion=2/12/2011, PackageDescription="4-Pin SOT-223 Package, 6.5 x 3.5 mm Body, 2.3 mm Pitch, 7 mm Lead Span", PackageReference=SOT-223, PackageVersion=2010

## Free pads (board coordinates)
  round 5.08 hole 2.54: 1(6.5,6.5) 2(84.3,6.5) 3(84.3,48.1) 4(6.5,48.1)

## Via types
v1: diameter 0.7, hole 0.3, Top Layer to Bottom Layer, 97 vias

## Nets (pads, with @x,y where several pads share a name; then routed paths per layer and width w, separated by ;. In a path a pad name is that pad's centre, name@x,y a point inside that pad or via, vN(x,y) a via of type N, cw(c..) or ccw(c..) an arc to the next point about the centre after c; other vN are vias at no path point)
3.3V: C1.2 C6.2 C15.2 C16.2 C17.2 C19.2 C20.2 C21.2 C24.1 C29.2 C30.2 D3.2 DEBUG.2 IC1.14 IC1.28 IC1.42 IC2.8 IC3.16 P1.2 P2.4 P3.4 R2.2 R3.2 R9.2 R10.2 R11.2 R18.1 R19.1 U1.3 U1.4 U2.6 U5.14 U7.2 U7.4 | length 320.3
  Top Layer w0.178: v1(39.837,11.287) 39.837,11.694 40.643,12.5 U2.6 ; P3.4 42.418,46.572 42.418,40.42 42.579,40.259 C20.2 ; C19.2 C20.2 ; IC2.8 46.945,32.817 ; R9.2 46.317,22.822 46.006,23.133 46.006,24.029 45.72,24.315 44.978,24.315 43.485,22.822 R11.2 R10.2 41,26.968 41,30.018 ; v1(52.275,8.915) DEBUG.2 ; v1(53.848,35.23) 54.254,35.23 54.475,35.009 IC3.16 54.475,34.163 53.645,34.163 52.934,34.874 C24.1 52.376,37.875 51.643,38.608 51.643,39.942 50.114,39.942 49.962,39.789 49.962,39.214 49.506,38.759 49.506,36.273 48.819,35.585 48.819,32.817 46.945,32.817 ; U5.14 62.24,47.361 ; v1(64.084,32.36) 64.084,40.738 64.077,40.745 64.077,42.882 ; IC1.14 70.375,9.347 70.121,9.093 70.002,9.093 ; v1(72.593,22.9) 72.875,22.618 IC1.42 72.875,15.392 75.184,13.083 76.275,13.083 IC1.28 77.876,13.1 ; P2.4 70.002,9.093 ; v1(78.156,12.344) 77.876,12.624 77.876,13.1 ; v1(78.892,5.258) 78.892,13.024 78.816,13.1 77.876,13.1 ; P1.2 77.597,48.34 75.848,50.089 68.199,50.089 67.894,49.784 67.894,47.904 65.354,45.364 65.354,42.607 64.353,42.607 64.077,42.882 ; 41,30.018 C29.2 41,32.004 41.475,32.479 C30.2 41.475,35.23 v1(40.65,35.966) C21.2 41.179,37.775 41.605,38.202 41.605,38.888 41.859,39.142 C20.2 ; 41,30.018 41.25,29.769 45.827,29.769 46.945,30.886 46.945,32.817 ; 62.24,47.361 62.24,46.512 61.392,45.664 61.392,30.852 60.572,30.032 60.572,29.058 61.392,28.238 61.392,14.988 60.505,14.102 60.505,12.655 60.96,12.2 R18.1 62.992,12.2 63.042,12.25 R19.1 63.9,11.379 66.186,9.093 70.002,9.093 ; 62.24,47.361 64.077,45.524 64.077,42.882
  Bottom Layer w0.178: U7.4 31.39,33.6 ; U1.3 U1.4 30.074,15.8 ; v1(39.837,11.287) 38.965,11.287 38.152,12.1 37.059,12.1 ; v1(40.65,35.966) 38.284,33.6 U7.2 31.39,33.6 ; v1(52.275,8.915) 51.531,9.659 49.751,9.659 49.008,8.915 40.243,8.915 37.059,12.1 ; v1(53.848,35.23) 54.465,34.613 57.97,34.613 60.604,31.979 63.071,31.979 63.35,31.699 ; R2.2 63.35,31.699 ; R3.2 R3.2@63.35,33.094 ; v1(64.084,32.36) R3.2@63.35,33.094 ; C6.2 v1(72.593,22.9) ; C17.2 69.85,7.722 70.053,7.518 71.577,7.518 P2.4 73.837,5.258 v1(78.892,5.258) ; C16.2 78.689,20.6 80.188,19.101 80.188,12.1 C15.2 78.4,12.1 v1(78.156,12.344) ; D3.2@25.883,15.083 25.883,15.85 25.756,15.977 21.869,15.977 21.869,12.294 22.758,11.405 31.09,11.405 32.537,12.852 35.646,12.852 35.9,12.598 C1.2 37.059,12.1 ; D3.2@25.883,15.083 25.883,15.075 D3.2 D3.2@25.883,15.083 ; D3.2@25.883,15.083 26.6,15.8 30.074,15.8 ; 30.074,15.8 29.87,16.003 29.87,32.08 31.39,33.6 ; 63.35,31.699 R3.2@63.35,33.094
5V: C11.1 C13.2 C14.2 L1.2 P4.1 R17.2 S*1.15 U4.4 U7.3 | length 98.2
  Top Layer w0.178: C13.2 C14.2 16.662,10.04 ; L1.2 17.622,11 16.662,10.04 ; v1(25.944,7) 22.903,10.04 16.662,10.04 ; C11.1 30.1,41.859 34.315,41.859 35.535,40.64 v1(35.535,31.3) ; U4.4 35.001,27.5 ; P4.1 33.97,13.066 ; v1(35.535,28.651) 35.001,28.118 35.001,27.5 ; v1(38.608,17.704) 33.97,13.066 ; 33.97,13.066 33.97,13.472 38.151,17.653 38.151,20.599 37.922,20.828 37.922,22.555 38.192,22.825 R17.2 38.675,24.389 35.564,27.5 35.001,27.5
  Bottom Layer w0.178: v1(25.944,7) P4.1 ; U7.3 34.595,31.3 ; v1(35.535,28.651) 34.595,29.591 34.595,31.3 ; v1(35.535,31.3) 34.595,31.3 ; v1(38.608,17.704) 53.654,17.704 S*1.15
+HV: D1.2 J1.2 P3.1 | length 23
  Top Layer w0.381: D1.2 32.131,47.6 32.331,47.4 P3.1
  Bottom Layer w0.381: J1.2 23.1,47.4 P3.1
CON_RS485A: C20.1 IC2.6 J1.3 P3.5 R10.1 R11.1 R12.2 U6.2 | length 90.3
  Top Layer w0.178: v1(42.57,34.696) 42.579,34.705 C20.1 ; P3.5 42.838,48.692 38.608,48.692 37.973,48.057 v1(37.973,39.85) 37.973,34.722 40.005,32.69 40.005,21.742 40.225,21.522 R10.1 R11.1 42.862,21.044 43.078,20.828 47.574,20.828 48.285,21.539 48.285,22.555 48.552,22.822 R12.2 49.036,25.592 50.089,26.645 50.089,30.537 49.485,31.14 IC2.6
  Bottom Layer w0.178: J1.3 27.772,37.1 30.124,34.747 34.574,34.747 35.59,35.763 U6.2 v1(37.973,39.85) 41.836,39.85 42.57,39.116 v1(42.57,34.696)
CON_RS485B: C22.2 IC2.7 J1.4 P3.6 R12.1 R15.2 R16.2 U6.1 | length 60.9
  Top Layer w0.178: v1(47.727,35.255) 48.215,35.744 ; v1(47.727,37.224) 48.711,37.224 ; IC2.7 48.215,35.744 ; C22.2 48.711,37.224 ; R12.1 49.403,21.522 R15.2@50.703,22.822 ; v1(50.114,23.635) 50.114,23.228 R15.2@50.703,22.822 ; R16.2 R15.2 R15.2@50.703,22.822 ; 48.215,35.744 48.215,36.148 48.711,36.644 48.711,37.224
  Bottom Layer w0.178: J1.4 27.762,41.3 28.212,41.75 U6.1 38.239,44.399 43.669,44.399 44.501,45.231 ; P3.6 44.501,45.231 ; v1(47.727,35.255) 50.114,32.868 v1(50.114,23.635) ; v1(47.727,37.224) 47.727,39.472 46.119,41.079 45.103,41.079 44.501,41.681 44.501,45.231
DEBUG_LED: IC1.3 R7.1 | length 39.4
  Top Layer w0.178: R7.1 36.775,20.807 v1(36.932,20.65) ; v1(67.869,20.396) 69.418,18.847 69.418,16.1 IC1.3
  Bottom Layer w0.178: v1(36.932,20.65) 55.644,20.65 57.626,18.668 66.141,18.668 v1(67.869,20.396)
GND: C1.1 C2.1 C3.2 C4.1 C5.1 C6.1 C7.2 C9.2 C10.2 C11.2 C12.1 C13.1 C14.1 C15.1 C16.1 C17.1 C19.1 C21.1 C22.1 C23.1 C24.2 C26.1 C27.1 C29.1 C30.1 D2.2 IC1.15 IC1.29 IC1.43 IC2.5 IC3.15 J1.1 J2.3 ON.1 P1.6 P2.5 P2.6 P3.10 P4.10 pad.1 pad.2 pad.3 pad.4 R5.1 R15.1 R16.1 RXD.1 S*1.5 S*1.6 S*1.14 TXD.1 U1.2 U2.1 U2.7 U2.15 U4.3 U4.5 U4.6 U5.7 U6.3 U7.1 | length 514.6
  Top Layer w0.178: pad.1 6.5,7.44 C12.1 11.965,7.44 ; pad.4 11.8,48.1 D2.2 11.8,42.3 15.316,38.784 ; C10.2 13.475,22.681 13.475,26.822 ; C14.1 C13.1 11.965,7.44 ; U4.6 14.484,25.8 13.475,26.822 ; v1(32.309,36.83) 32.309,36.576 31.775,36.043 C11.2@30.1,36.043 ; U4.5 30.582,29.2 30.1,29.682 ; S*1.5 40.65,40.85 C21.1 ; U2.7 42.305,12 ; U2.1 42.9,15 U2.15 42.9,12 42.305,12 ; C29.1 43.9,31.699 42.825,32.774 C30.1 44.049,33.55 44.637,34.138 44.637,37.303 ; C19.1 C19.1@44.637,37.522 ; v1(45.39,36.551) 44.637,37.303 ; ON.1 50.4,11.906 51.003,11.303 51.003,8.321 50.683,8.001 50.683,6.097 52.139,4.641 54.471,4.641 P4.10 56.075,7.755 RXD.1 TXD.1 54.175,15.192 53.645,15.723 53.442,15.723 53.225,15.939 S*1.14 53.225,20.345 53.152,20.418 R16.1 R15.1 ; IC2.5 50.755,32.956 54.864,32.956 55.125,33.218 IC3.15 55.125,35.974 54.992,36.107 C26.1 ; C27.1 58.522,37.875 58.268,38.129 58.268,45.962 P3.10 55.982,46.552 55.982,38.811 55.677,38.506 54.992,38.506 C26.1 ; U5.7 69.86,45.517 71.079,46.736 80.62,46.736 80.823,46.533 80.823,43.485 80.598,43.26 ; IC1.15 70.875,11.363 v1(70.891,11.379) ; v1(70.993,24.611) 70.993,21.55 72.375,20.168 72.375,19.446 ; v1(71.399,19.888) 71.933,19.888 72.375,19.446 ; IC1.43 72.375,19.446 ; v1(75.616,13.716) 75.732,13.6 IC1.29 78.932,13.6 79.527,13.005 79.527,4.902 79.248,4.623 78.435,4.623 77.825,5.233 P2.6 ; P1.6 80.598,43.26 ; pad.2 84.3,31.96 J2.3 84.3,34.36 84.3,44.654 ; pad.3 84.3,44.654 ; 11.965,7.44 11.684,7.722 11.684,31.784 J1.1 ; 13.475,26.822 C9.2 13.564,28.489 13.564,31.051 17,34.488 J1.1 ; 15.316,38.784 J1.1 ; 15.316,38.784 15.316,48.717 16.408,49.809 20.041,49.809 20.269,49.581 20.269,47.067 30.1,37.236 C11.2@30.1,36.043 ; 30.1,29.682 C11.2 C11.2@30.1,36.043 ; 30.1,29.682 30.1,26.01 30.31,25.8 U4.3 35.033,25.8 35.636,25.197 35.636,20.864 S*1.6 v1(34.7,16.75) 33.172,15.222 v1(33.172,10.668) 32.893,10.389 32.893,5.918 47.168,5.918 47.752,6.502 47.752,9.119 45.466,11.405 42.901,11.405 42.305,12 ; 44.637,37.303 C19.1@44.637,37.522 ; C19.1@44.637,37.522 46.653,37.522 C23.1 46.99,37.892 48.34,39.242 C22.1 49.377,39.242 49.567,39.433 49.567,40.081 49.784,40.297 51.998,40.297 51.998,39.525 52.299,39.225 C24.2 53.264,39.225 54.614,37.875 C26.1 ; 80.598,43.26 82.906,43.26 84.3,44.654
  Bottom Layer w0.178: v1(32.309,36.83) 32.664,36.474 32.664,35.9 U7.1 33.1,38.227 33.3,38.427 U6.3 38.15,40.8 S*1.5 41.216,40.284 42.469,40.284 45.39,37.363 v1(45.39,36.551) ; v1(33.172,10.668) 33.304,10.8 C5.1 C1.1 ; U1.2 v1(34.7,16.75) ; S*1.6 38.143,20.193 52.307,20.193 S*1.14 ; P3.10 62.861,41.369 70.325,41.369 70.714,41.758 70.714,42.799 71.12,43.205 79.405,43.205 pad.3 ; R5.1 62.05,24.158 62.586,23.622 67.7,23.583 ; C6.1 67.7,23.583 ; C4.1 C3.2 C2.1 67.7,27.305 69.52,27.305 70.002,26.822 70.002,25.171 C7.2@69.442,24.611 ; v1(70.891,11.379) 71.15,11.121 C17.1 73.235,8.4 P2.5 P2.6 82.042,6.35 82.042,6.5 pad.2 ; v1(70.993,24.611) C7.2@69.442,24.611 ; v1(71.399,19.888) 72.3,19.888 ; C16.1 72.3,19.888 ; v1(75.616,13.716) 75.932,13.4 C15.1 79.4,17.882 78.536,18.745 73.076,18.745 72.3,19.521 72.3,19.888 ; 67.7,23.583 67.7,23.622 68.148,23.622 68.191,23.579 68.631,24.105 68.631,24.611 C7.2 C7.2@69.442,24.611
HF_GAS_VOUT_P: C7.1 IC1.20 P3.9 U2.8 | length 157.6
  Top Layer w0.178: U2.8 45.872,12 48.133,9.739 48.133,5.42 50.124,3.429 75.518,3.429 ; v1(54.29,40.427) P3.9 ; v1(62.84,44.907) 62.84,39.091 63.678,38.252 63.678,33.18 63.467,32.969 63.467,27.109 v1(64.465,26.111) ; IC1.20 73.375,10.973 73.807,11.405 75.387,11.405 76.715,10.077 76.715,4.626 75.518,3.429 ; v1(80.289,39.573) 80.289,4.445 79.273,3.429 75.518,3.429
  Bottom Layer w0.178: v1(54.29,40.427) 55.143,39.573 v1(80.289,39.573) ; P3.9 55.143,47.4 55.143,47.549 56.083,48.489 59.258,48.489 v1(62.84,44.907) ; v1(64.465,26.111) 64.465,25.222 65.43,24.257 67.7,24.257 C7.1
HF_GAS_VOUT_S: C8.1 IC1.21 R6.1 U2.9 | length 71.9
  Top Layer w0.178: U2.9 47.142,12.5 49.733,9.909 49.733,8.255 50.328,7.66 50.328,5.197 51.257,4.267 59.334,4.267 60.147,5.08 ; v1(60.604,28.067) 60.96,27.711 60.96,15.443 60.147,14.63 60.147,5.08 ; IC1.21 73.838,8.534 73.838,5.69 73.381,5.232 60.147,5.08
  Bottom Layer w0.178: v1(60.604,28.067) 60.858,27.813 62.05,27.813 ; R6.1 62.05,27.813 ; C8.1 66.591,26.322 65.1,27.813 62.05,27.813
ME_CO_AN: IC1.24 P4.6 S*1.9 | length 60.4
  Top Layer w0.178: S*1.9 38.864,14.914 38.864,10.315 40.416,8.763 44.907,8.763 P4.6 ; v1(49.708,5.664) 49.708,4.659 50.481,3.886 75.234,3.886 76.36,5.012 76.36,8.313 75.375,9.297 IC1.24
  Bottom Layer w0.178: P4.6 47.737,8.067 49.987,8.067 50.292,7.762 50.292,6.248 v1(49.708,5.664)
ME_CO_DAC: IC1.23 P4.5 S*1.10 | length 93.3
  Top Layer w0.178: S*1.10 46.072,19.275 46.304,19.507 46.304,19.761 46.736,20.193 49.987,20.193 50.216,19.964 50.216,18.694 51.359,17.551 51.359,15.723 52.794,15.723 53.162,15.354 v1(53.162,5.578) ; IC1.23 74.875,8.564 v1(75.743,7.696)
  Bottom Layer w0.178: P4.5 46.101,5.029 50.875,5.029 ; v1(53.162,5.578) 50.875,5.578 50.875,5.029 ; v1(75.743,7.696) 77.368,9.322 86.131,9.322 87.122,8.331 87.122,4.039 86.766,3.683 73.736,3.683 72.111,5.309 70.841,5.309 69.647,4.115 61.468,4.115 57.516,8.067 56.083,8.067 55.763,7.747 55.763,6.335 54.458,5.029 50.875,5.029
ME_CO_UART_RXD: IC1.4 P4.3 S*1.7 | length 52.9
  Top Layer w0.178: v1(37.414,13.106) 37.414,14.852 37.675,15.113 ; P4.3 37.675,8.375 37.675,15.113 ; S*1.7 39.225,16.662 37.675,15.113 ; IC1.4 70.176,15.6 v1(70.587,15.189)
  Bottom Layer w0.178: v1(37.414,13.106) 38.779,13.106 39.624,12.261 67.429,12.261 68.739,13.571 69.375,13.571 70.587,14.783 v1(70.587,15.189)
ME_CO_UART_TXD: IC1.5 P4.4 S*1.8 | length 53.4
  Top Layer w0.178: S*1.8 41.225,17.858 38.031,14.664 38.031,10.559 P4.4 ; v1(57.125,5.512) 59.512,7.899 v1(59.512,13.36) ; IC1.5 69.482,15.1 v1(69.672,14.91)
  Bottom Layer w0.178: P4.4 43.949,4.641 56.254,4.641 v1(57.125,5.512) ; v1(59.512,13.36) 60.002,12.871 67.145,12.871 69.184,14.91 v1(69.672,14.91)
ME_CO_VOUT: IC1.22 P4.2 S*1.1 | length 133.3
  Top Layer w0.178: v1(71.67,4.505) 73.846,4.505 74.218,4.877 74.218,7.417 74.375,7.574 IC1.22
  Bottom Layer w0.178: S*1.1 47.425,42.977 47.752,43.304 47.752,47.955 47.219,48.489 40.64,48.489 40.132,47.981 40.132,46.33 38.608,44.806 22.555,44.806 20.828,43.078 20.828,9.322 25.044,5.105 34.615,5.105 P4.2 39.91,3.6 70.764,3.6 v1(71.67,4.505)
NetC2_2: C2.2 U1.1 | length 66
  Bottom Layer w0.178: U1.1 35.585,17.7 39.221,14.064 40.531,14.064 41.935,15.469 47.346,15.469 48.285,16.408 63.652,16.408 63.83,16.231 65.938,16.231 71.095,21.387 78.029,21.387 78.918,22.276 78.918,27.192 78.029,28.081 C2.2
NetC8_2: C8.2 R6.2 U2.10 | length 41
  Top Layer w0.178: U2.10 47.279,13 48.584,14.305 v1(48.584,15.773) ; v1(66.548,15.773) v1(66.548,24.892)
  Bottom Layer w0.178: v1(48.584,15.773) 48.837,16.026 63.131,16.026 63.383,15.773 v1(66.548,15.773) ; R6.2 64.011,27.134 65.165,27.134 66.747,25.552 67.208,25.552 ; v1(66.548,24.892) 67.208,25.552 ; C8.2 69,25.806 68.746,25.552 67.208,25.552
NetC9_1: C9.1 C10.1 C12.2 D1.1 U4.1 | length 123.3
  Top Layer w0.178: C12.2 9.111,10.04 ; D1.1 23.3,49.581 21.954,50.927 4.877,50.927 3.683,49.733 3.683,45.288 5.715,43.256 5.715,28.4 C9.1 5.725,22.681 5.8,22.606 C10.1 8.128,16.9 8.585,16.443 8.585,10.566 9.111,10.04 ; U4.1 32.131,22.4 32.131,7.417 28.397,3.683 4.877,3.683 3.683,4.877 3.683,8.941 4.783,10.04 9.111,10.04
NetC18_2: C18.2 D3.1 IC1.40 | length 56.5
  Top Layer w0.178: v1(73.875,17.07) IC1.40
  Bottom Layer w0.178: D3.1 22.598,14.503 23.157,13.945 ; C18.2 23.775,13.335 23.157,13.945 ; v1(73.875,17.07) 69.038,17.07 66.309,14.341 58.589,14.341 57.957,13.709 38.922,13.709 38.686,13.945 23.157,13.945
NetC23_2: C23.2 D4.1 R14.1 U5.11 | length 66.2
  Top Layer w0.178: C23.2 47.346,39.242 53.01,44.906 53.01,48.311 54.153,49.454 ; R14.1 57.988,21.522 58.924,20.587 D4.1 59.675,22.261 60.604,23.19 60.604,26.834 59.988,27.45 59.988,30.074 60.96,31.046 60.96,48.641 60.147,49.454 54.153,49.454 ; U5.11 66.05,49.987 65.542,50.495 55.194,50.495 54.153,49.454
NetC25_1: C25.1 IC3.1 | length 11.9
  Top Layer w0.178: v1(50.876,35.255) C25.1 ; v1(52.959,28.423) 54.475,28.423 IC3.1
  Bottom Layer w0.178: v1(50.876,35.255) 52.959,33.172 v1(52.959,28.423)
NetC25_2: C25.2 IC3.3 | length 16
  Top Layer w0.178: C25.2 50.876,38.608 50.14,38.608 50.089,38.557 50.089,31.445 52.095,29.439 55.474,29.439 55.775,29.137 IC3.3
NetC26_2: C26.2 IC3.2 | length 40.1
  Top Layer w0.178: C26.2 54.992,46.33 55.677,47.014 55.677,48.082 56.083,48.489 58.522,48.489 60.604,46.406 60.604,31.217 59.538,30.15 59.538,27.305 55.125,27.305 IC3.2
NetC27_2: C27.2 IC3.6 | length 12.8
  Top Layer w0.178: IC3.6 57.725,29.785 60.249,32.309 60.249,38.659 59.683,39.225 C27.2
NetC28_1: C28.1 IC3.4 | length 12.1
  Top Layer w0.178: IC3.4 56.425,29.906 59.538,33.019 59.538,35.204 58.105,36.637 57.801,36.637 57.05,37.389 C28.1
NetC28_2: C28.2 IC3.5 | length 13.5
  Top Layer w0.178: C28.2 57.05,38.76 57.506,38.76 57.861,38.405 57.861,37.617 59.893,35.585 59.893,32.663 57.075,29.845 IC3.5
NetD2_1: D2.1 L1.1 U4.2 | length 44.1
  Top Layer w0.178: D2.1 19,36.931 28.753,27.178 28.753,25.421 30.074,24.1 ; L1.1 29.6,23.626 30.074,24.1 ; U4.2 30.074,24.1
NetD4_2: D4.2 IC2.4 R14.2 U5.8 | length 63.1
  Top Layer w0.178: v1(49.555,42.484) 50.683,43.612 50.683,48.829 v1(52.095,50.241) ; v1(52.248,27.61) 51.42,28.438 IC2.4 50.755,26.746 53.638,23.863 58.979,23.863 ; R14.2 57.937,22.822 58.979,23.863 ; D4.2 58.979,23.863 ; U5.8 69.86,49.098 71.577,49.098 71.857,49.378 v1(71.857,49.428)
  Bottom Layer w0.178: v1(49.555,42.484) 49.555,35.382 52.248,32.69 v1(52.248,27.61) ; v1(52.095,50.241) 52.349,50.495 70.79,50.495 v1(71.857,49.428)
NetDEBUG_1: DEBUG.1 R7.2 | length 25.3
  Top Layer w0.178: R7.2 37.389,22.825 37.821,23.257 37.821,23.647 v1(37.871,23.698) ; DEBUG.1 v1(52.275,18.339)
  Bottom Layer w0.178: v1(37.871,23.698) 36.297,22.123 36.297,18.644 36.601,18.339 v1(52.275,18.339)
NetIC2_1: IC2.1 U5.13 | length 42.5
  Top Layer w0.178: v1(44.501,40.231) 44.501,44.12 45.415,45.034 v1(45.415,49.479) ; v1(46.025,28.88) 46.945,28.88 IC2.1 ; v1(61.214,49.479) 61.824,50.089 63.51,50.089 U5.13
  Bottom Layer w0.178: v1(44.501,40.231) 46.025,38.707 v1(46.025,28.88) ; v1(45.415,49.479) 45.633,49.262 53.065,49.262 53.282,49.479 v1(61.214,49.479)
NetIC2_2: IC2.2 IC2.3 U5.10 | length 44.2
  Top Layer w0.178: v1(45.517,40.462) 46.406,41.351 46.406,43.078 50.328,47 50.328,49.446 51.74,50.858 66.058,50.858 67.32,49.596 U5.10 ; v1(48.215,31.77) IC2.2 IC2.3
  Bottom Layer w0.178: v1(45.517,40.462) 45.796,40.462 46.7,39.559 46.7,33.285 v1(48.215,31.77)
NetON_2: ON.2 R17.1 | length 15.1
  Top Layer w0.178: R17.1 38.675,20.726 39.081,20.32 43.739,20.32 44.145,19.914 44.145,18.505 45.053,17.598 48.545,17.598 49.593,16.55 ON.2
NetR1_2: R1.2 U1.5 | length 45.8
  Bottom Layer w0.178: U1.5 31.699,17.7 32.258,18.259 32.258,24.333 34.239,26.314 47.955,26.314 48.92,25.349 48.92,23.571 49.53,22.962 50.343,22.962 57.413,30.032 61.756,30.032 61.816,29.972 63.045,29.972 63.35,29.667 R1.2
NetR4_1: R4.1 U2.14 U3.1 | length 46.7
  Top Layer w0.178: U2.14 45.632,15 46.039,15.406 v1(46.039,16.626) ; v1(65.507,16.866) 65.507,20.472 v1(65.913,20.879) 65.913,34.063 U3.1
  Bottom Layer w0.178: v1(46.039,16.626) 46.279,16.866 v1(65.507,16.866) ; R4.1 62.05,21.946 63.117,20.879 v1(65.913,20.879)
NetR4_2: R4.2 U2.13 U3.3 | length 49.3
  Top Layer w0.178: U2.13 45.791,14.5 46.656,15.365 46.656,16.916 46.33,17.242 45.72,17.242 45.237,16.76 v1(45.237,16.18)
  Bottom Layer w0.178: v1(45.237,16.18) 45.237,16.76 45.72,17.242 62.277,17.242 63.347,18.313 67.259,18.313 69.044,20.098 69.044,21.539 68.758,21.826 ; R4.2 64.643,22.856 65.673,21.826 68.758,21.826 ; U3.3 72.776,21.826 68.758,21.826
NetR5_2: R5.2 U2.2 | length 42.6
  Top Layer w0.178: v1(40.157,14.681) 40.339,14.5 U2.2
  Bottom Layer w0.178: v1(40.157,14.681) 40.005,14.834 39.091,14.834 35.941,17.983 35.941,22.885 37.389,24.333 45.923,24.333 48.006,22.25 52.832,22.25 56.456,25.875 62.649,25.875 62.921,25.603 62.921,24.914 R5.2
NetR8_1: R8.1 RXD.2 | length 20.3
  Top Layer w0.178: v1(44.018,21.895) 44.391,21.522 R8.1 ; RXD.2 56.075,17.873 v1(58.166,19.964)
  Bottom Layer w0.178: v1(44.018,21.895) 44.425,21.488 56.642,21.488 v1(58.166,19.964)
NetR8_2: R8.2 U5.3 U5.12 | length 58.3
  Top Layer w0.178: R8.2 44.92,23.355 v1(45.263,23.698) ; v1(63.779,19.304) 63.779,24.308 65.1,25.629 65.1,27.711 64.872,27.94 64.872,41.808 v1(64.694,41.986) ; U5.3 v1(64.78,45.796) 64.78,46.33 U5.12
  Bottom Layer w0.178: v1(45.263,23.698) 44.729,23.698 43.383,22.352 43.383,21.514 43.891,21.006 55.829,21.006 57.531,19.304 v1(63.779,19.304) ; v1(64.694,41.986) 64.694,45.71 v1(64.78,45.796)
NetR13_1: R13.1 TXD.2 | length 5.4
  Top Layer w0.178: TXD.2 54.175,19.834 55.21,20.869 R13.1
NetR13_2: R13.2 U5.6 U5.9 | length 45.6
  Top Layer w0.178: v1(54.204,22.479) 54.547,22.822 R13.2 ; v1(68.428,21.209) 69.723,22.504 69.723,40.628 68.59,41.761 U5.6 U5.9
  Bottom Layer w0.178: v1(54.204,22.479) 57.871,22.479 60.088,20.262 66.548,20.262 67.495,21.209 v1(68.428,21.209)
NetU2_12: U2.12 U3.2 | length 55.7
  Top Layer w0.178: U2.12 46.664,14 v1(47.32,14.656) ; v1(62.789,15.392) 63.112,15.715 63.112,33.122 63.322,33.332 63.322,36.22 v1(62.916,36.627)